# Altium PCB ESCREV6.PcbDoc
Units mm, origin at the board's own origin, x right, y up, seen from the top; angles counter-clockwise.
Board outline 41.56 x 22.07 mm, 2 copper layers (Top Layer, Bottom Layer), stack 1.571 mm thick; 59 components, 42 nets, 242 pads, 93 vias.
Unrouted connection lines stored in the file: 2.
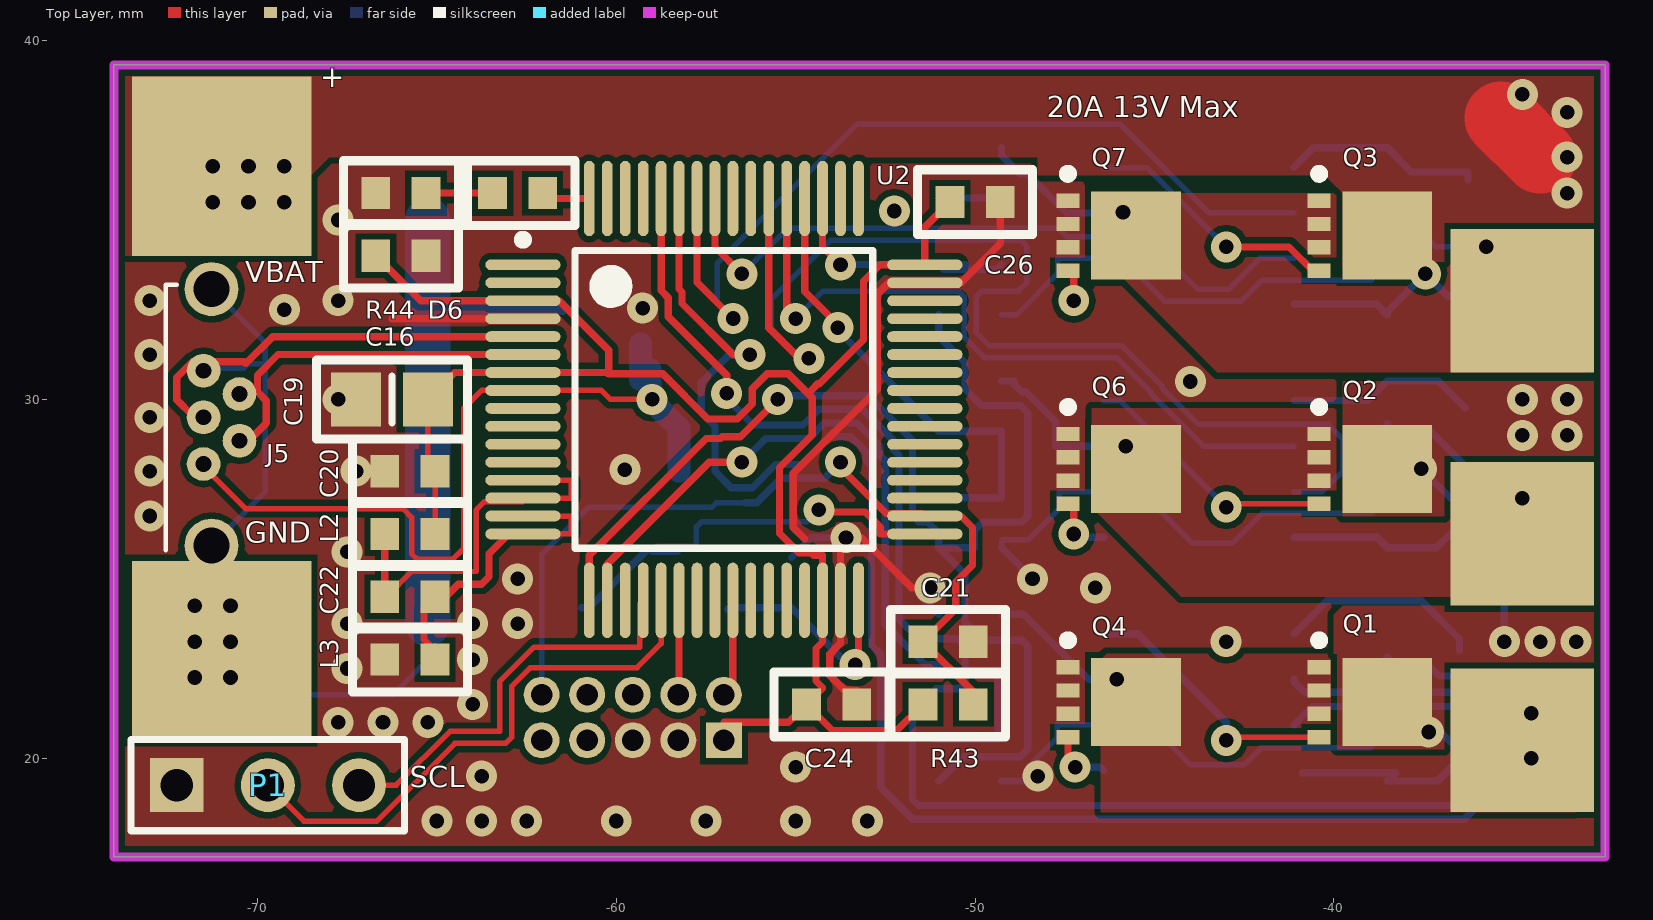
[diagram p0: Top Layer view]
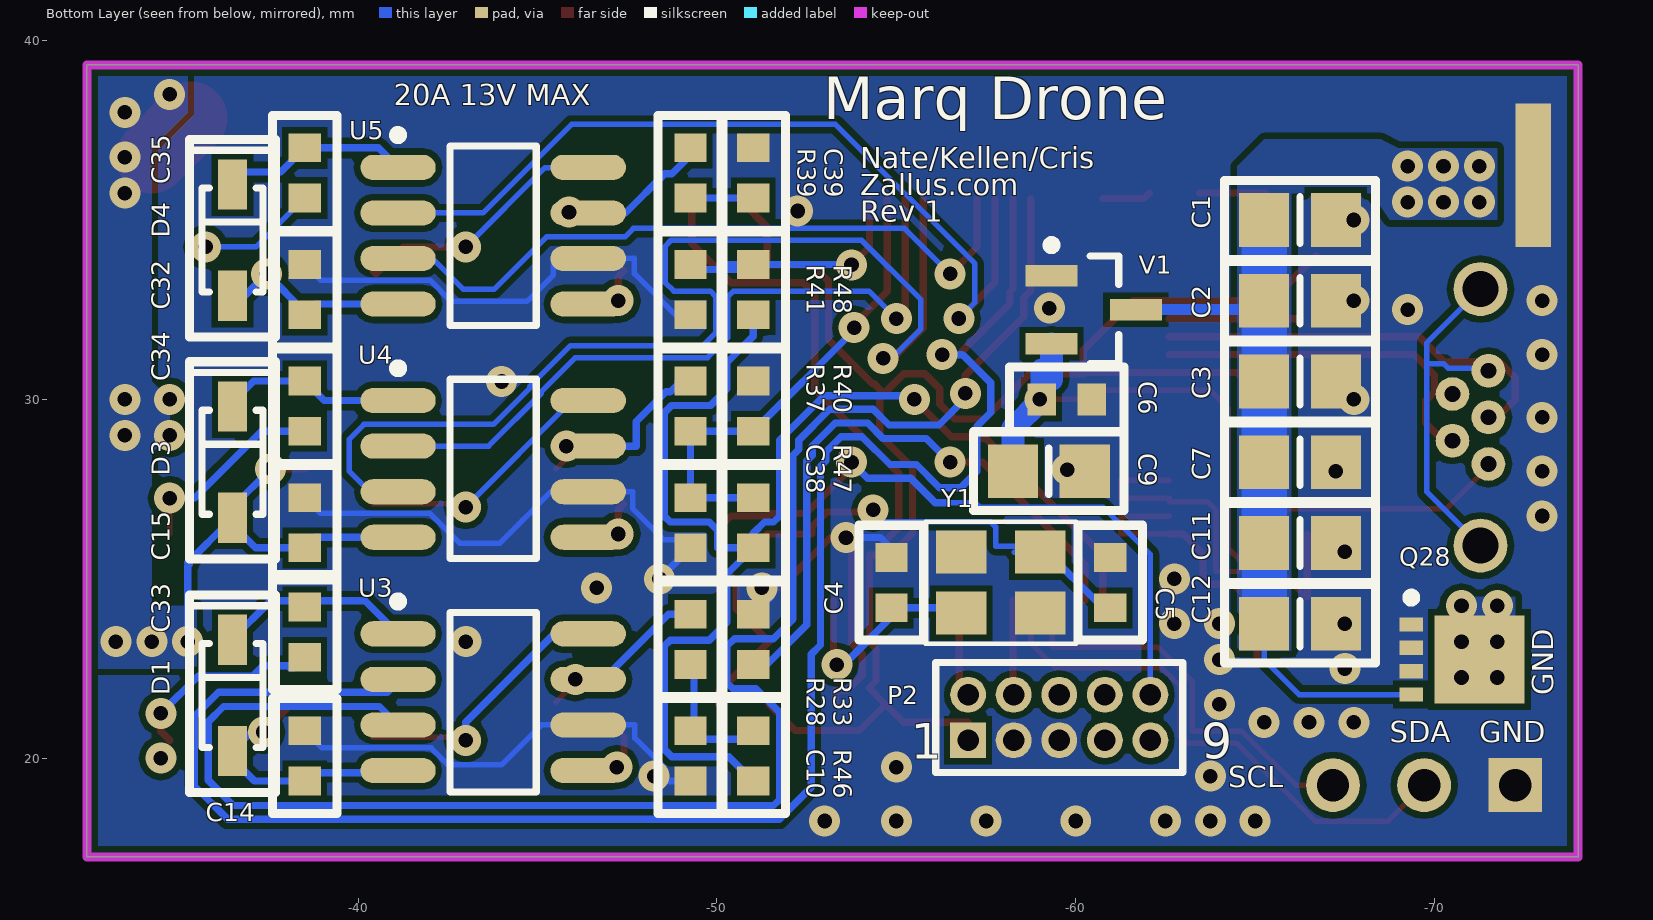
[diagram p1: Bottom Layer view, seen from below]
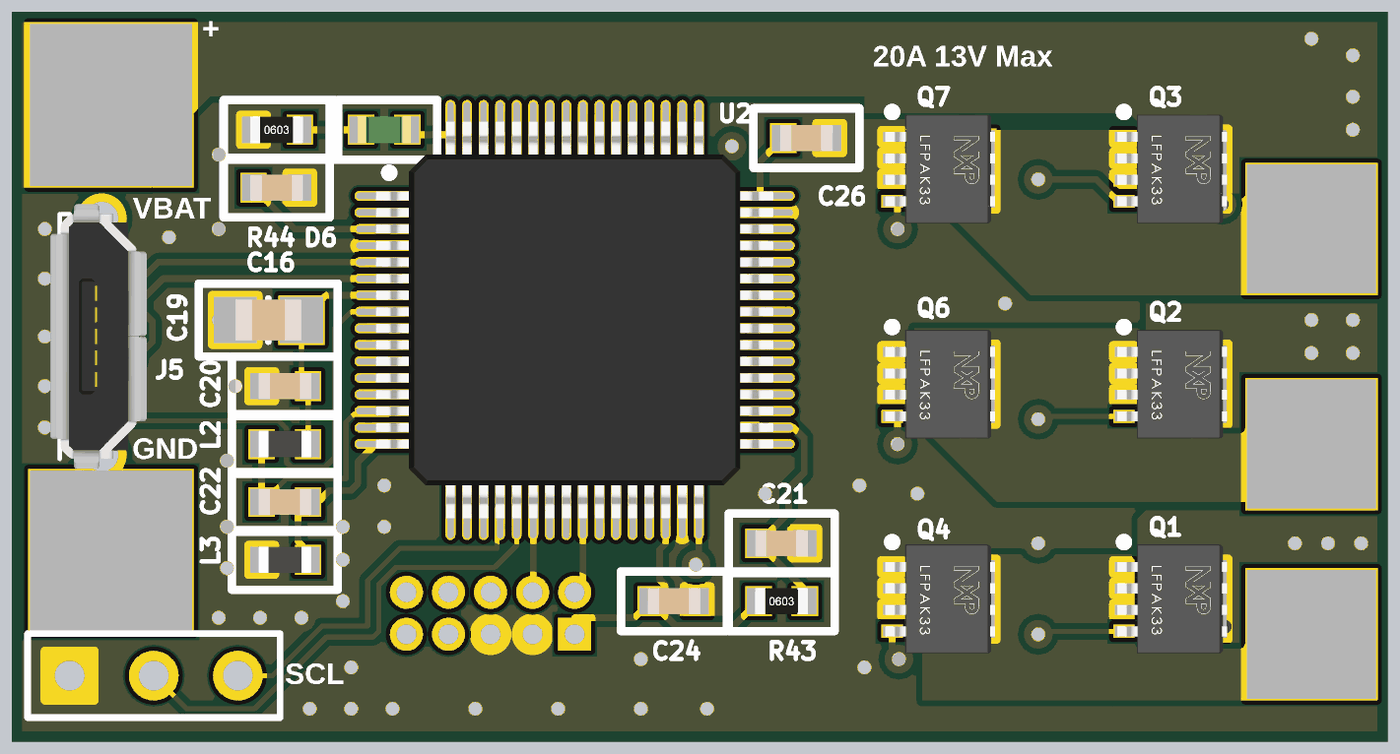
[diagram p2: 3D render of the assembled board from above, using the file's embedded part models]
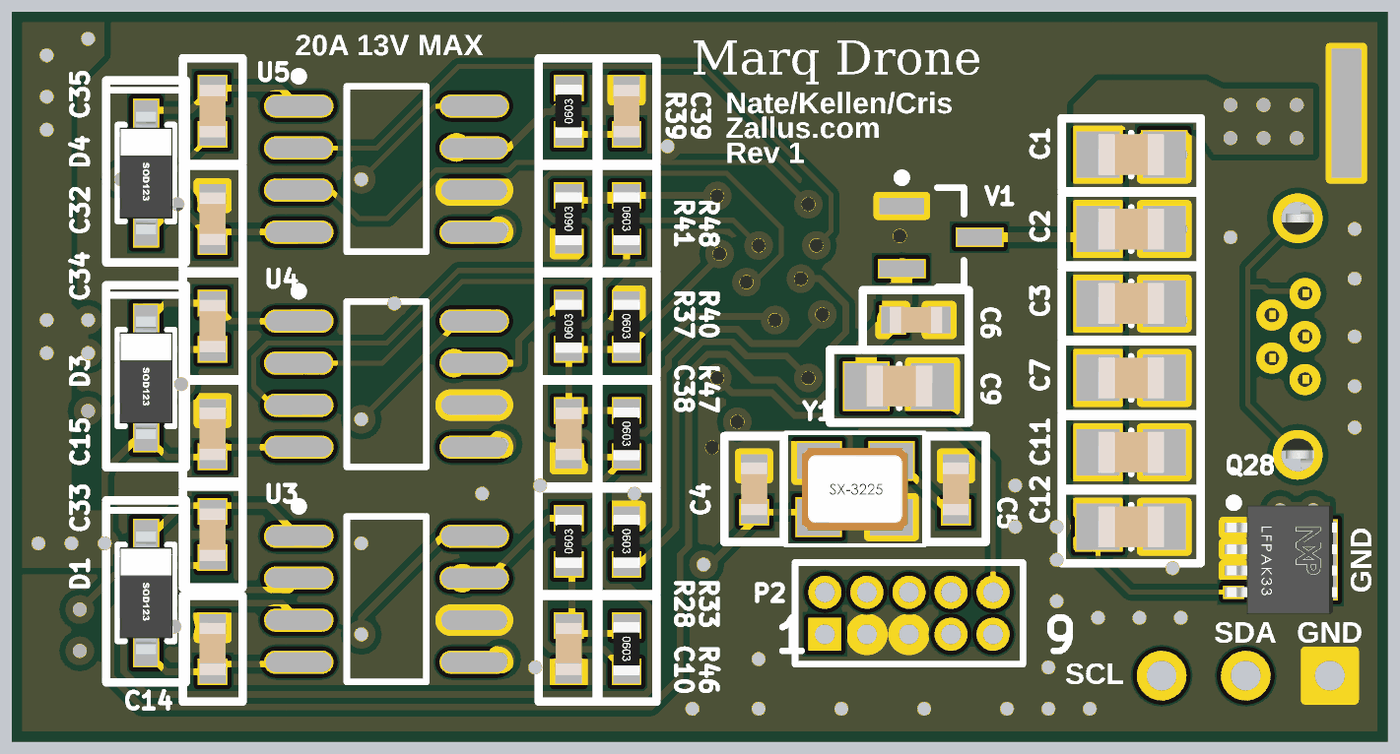
[diagram p3: 3D render of the assembled board from below, using the file's embedded part models]

## Layer stack, top to bottom
Top Solder: solder mask 0.0102, Solder Resist, Dk 3.5
Top Layer: signal copper 0.0356
Dielectric 1: core 1.5, FR-4, Dk 4.2
Bottom Layer: signal copper 0.0356
Solder Side: solder mask 0.0102, Solder Resist, Dk 3.5

## Board outline
-74,17.25 -32.444,17.25 -32.444,39.32 -74,39.32

## Design rules (kind name [scope] priority, off if disabled: settings)
AssemblyTestPointUsage [All] p1 off:
AssemblyTestpoint [All] p1 off: testpointundercomponent=TRUE minsize=1.016 maxsize=2.54 preferedsize=1.524 minholesize=0 maxholesize=1.016 preferedholesize=0.813 testpointgrid=0.025 usegrid=TRUE gridtolerance=0 allowsidetop=TRUE allowsidebottom=TRUE
Clearance Clearance_1 [InComponent('J13') OR InComponent('J16') OR InComponent('J7')] p1: gap=0.381
Clearance Clearance_3 [InComponent('H1') OR InComponent('H3') OR InComponent('H4') OR InComponent('H5') OR InComponent('H6') OR InComponent('H7') OR InComponent('H8') OR InComponent('H9')] p2: gap=0.381
Clearance Clearance_2 [(OnLayer('Test Planea')OR OnLayer('Test Plane'))] p3: gap=0.216
Clearance [All] p4: gap=0.178
ComponentClearance [All] p1 off: gap=0.254 collisioncheckmode=3 verticalgap=0.254 showdistances=FALSE
DiffPairsRouting [All] p1: maxlimit=5.08 minlimit=0.254 mostfreqgap=0.254 toplayer_minwidth=0.203 toplayer_maxwidth=0.381 toplayer_prefwidth=0.381 bottomlayer_minwidth=0.203 bottomlayer_maxwidth=0.381 bottomlayer_prefwidth=0.381 maxuncoupledlength=25.4
FabricationTestPointUsage [All] p1 off: valid=0 allowmultiple=FALSE
FabricationTestpoint [All] p1 off: side=3 testpointundercomponent=TRUE minsize=1.016 maxsize=2.54 preferedsize=1.524 minholesize=0 maxholesize=1.016 preferedholesize=0.813 testpointgrid=0.025 allowsidetop=TRUE allowsidebottom=TRUE usegrid=TRUE gridtolerance=0
HoleSize [All] p1: absolutevalues=TRUE maxlimit=6.35 minlimit=0.025 maxpercent=80.000 minpercent=20.000
HoleToHoleClearance [All] p1: gap=0.305 allowstackedmicrovias=FALSE
MinimumSolderMaskSliver [All] p1: minsoldermaskwidth=0.152
PasteMaskExpansion [All] p1: expansion=-0.051
PlaneConnect [All] p1: planeconnectstyle=Direct reliefexpansion=0.508 reliefentries=4 reliefconductorwidth=0.508 reliefairgap=0.254
PolygonConnect PolygonConnect_1 [(InComponent('D13') OR InComponent('D13') OR InComponent('L9')OR InComponent('L9')OR InComponent('R121')OR InComponent('Q15')OR InComponent('C89')OR InComponent('C90')OR InComponent('C85')OR InComponent('C86')OR InComponent('R118')OR InComponent('C84')OR InComponent('C95')OR InComponent('U12')OR  InComponent('U10')OR InComponent('C97')OR InComponent('C98')OR InComponent('C96')OR InComponent('U11')OR InComponent('D14')OR InComponent('L10')OR InComponent('R124')OR InComponent('C93')OR InComponent('R123'))] p1: connectstyle=Direct reliefconductorwidth=0.254 reliefentries=4 polygonreliefangle="90 Angle" airgapwidth=0.254
PolygonConnect [All] p2: connectstyle=Direct reliefconductorwidth=0.254 reliefentries=4 polygonreliefangle="90 Angle" airgapwidth=0.254
RoutingVias [All] p1: holewidth=0.406 width=0.864 viastyle="Through Hole" minholewidth=0.406 minwidth=0.864 maxholewidth=0.406 maxwidth=0.864
SMDEntry [All] p1: side=TRUE corner=FALSE anyangle=TRUE
SilkToSilkClearance [All] p1: silktosilkclearance=0.025
SilkToSolderMaskClearance SilkscreenOverComponentPads [IsPad] p1: minsilkscreentomaskgap=0.025 clearancetoexposedcopper=TRUE
SolderMaskExpansion SolderMaskExpansion_1 [InComponent('U2')OR InComponent('U27')OR InComponent('J14')] p1: expansion=0
SolderMaskExpansion [All] p2: expansion=0.127
Width Width_3 [InNet('GND')] p1: maxlimit=2.032 minlimit=0.152 preferedwidth=0.203 minimp=50.000000 maximp=50.000000 favimp=50.000000
Width Width_2 [InNet('3.3V')] p2: maxlimit=1.016 minlimit=0.152 preferedwidth=0.305
Width Width_1 [InNet('5V')] p3: maxlimit=1.016 minlimit=0.152 preferedwidth=0.305
Width [All] p4: maxlimit=2.032 minlimit=0.152 preferedwidth=0.203 minimp=50.000000 maximp=50.000000 favimp=50.000000
17 further rules are at their usual default settings.

## Classes and differential pairs
differential pair USB_MCU: +USB_MCU_P -USB_MCU_N

## Components (designator, comment, footprint, x,y, rotation, side; value= is the part's Value field where it differs from the comment)
C1 "Cap" 6-0805_MC -66.25,35 r0 bottom
C2 "Cap" 6-0805_MC -66.25,32.75 r0 bottom
C3 "Cap" 6-0805_MC -66.25,30.5 r0 bottom
C4 "CL05C180JB5NNNC" 1608[0603]C -54.864,24.892 r270 bottom
C5 "CL05C180JB5NNNC" 1608[0603]C -60.96,24.892 r270 bottom
C6 "0805" 1608[0603]C -59.75,30 r0 bottom
C7 "Cap" 6-0805_MC -66.25,28.25 r0 bottom
C9 "Cap" 6-0805_MC -59.25,28 r0 bottom
C10 "0805" 1608[0603]C -49.263,20.063 r90 bottom
C11 "Cap" 6-0805_MC -66.25,26 r0 bottom
C12 "Cap" 6-0805_MC -66.25,23.75 r0 bottom
C14 "0805" 1608[0603]C -38.513,20.063 r270 bottom
C15 "0805" 1608[0603]C -38.513,26.563 r270 bottom
C16 "0805" 1608[0603]C -66,34 r180 top
C19 "0805" 6-0805_MC -66.25,30 r180 top
C20 "0805" 1608[0603]C -65.75,28 r180 top
C21 "0805" 1608[0603]C -50.75,23.25 r180 top
C22 "0805" 1608[0603]C -65.75,24.5 r180 top
C24 "0805" 1608[0603]C -54,21.5 r180 top
C26 "0805" 1608[0603]C -50,35.5 r0 top
C32 "0805" 1608[0603]C -38.513,33.063 r270 bottom
C33 "0805" 1608[0603]C -38.513,23.513 r90 bottom
C34 "0805" 1608[0603]C -38.513,29.813 r90 bottom
C35 "0805" 1608[0603]C -38.513,36.313 r90 bottom
C38 "0805" 1608[0603]C -49.263,26.563 r90 bottom
C39 "0805" 1608[0603]C -51.013,36.313 r270 bottom
D1 "1N4148WFL-G3-08" SOD123_3D -36.5,21.75 r90 bottom
D3 "1N4148WFL-G3-08" SOD123_3D -36.5,28.25 r90 bottom
D4 "1N4148WFL-G3-08" SOD123_3D -36.5,34.442 r90 bottom
D6 "LED3" 1608[0603]LED -62.75,35.75 r180 top
J5 "614105150721" USB_Micro_Vertical -71.5,29.5 r90 top
L2 "FB" 1608[0603]L -65.75,26.25 r0 top
L3 "FB" 1608[0603]L -65.75,22.75 r180 top
P1 "Header 3" HDR1X3 -72.25,19.25 r0 top
P2 "Header 5X2" MHDR2X5 -57,20.5 r180 bottom
Q1 "PSMN011-60MLX" SOT1210_FET -39.013,21.563 r0 top
Q2 "PSMN011-60MLX" SOT1210_FET -39.013,28.063 r0 top
Q3 "PSMN011-60MLX" SOT1210_FET -39.013,34.563 r0 top
Q4 "PSMN011-60MLX" SOT1210_FET -46.013,21.563 r0 top
Q6 "PSMN011-60MLX" SOT1210_FET -46.013,28.063 r0 top
Q7 "PSMN011-60MLX" SOT1210_FET -46.013,34.563 r0 top
Q28 "PSMN011-60MLX" SOT1210_FET -70.75,22.75 r180 bottom
R28 "Res1" 1608[0603]R -49.263,23.313 r270 bottom
R33 "Res1" 1608[0603]R -51.013,23.313 r90 bottom
R37 "Res1" 1608[0603]R -49.263,29.813 r270 bottom
R39 "Res1" 1608[0603]R -49.263,36.313 r270 bottom
R40 "Res1" 1608[0603]R -51.013,29.813 r90 bottom
R41 "Res1" 1608[0603]R -49.263,33.063 r270 bottom
R43 "Res1" 1608[0603]R -50.75,21.5 r180 top
R44 "Res1" 1608[0603]R -66,35.75 r180 top
R46 "Res1" 1608[0603]R -51.013,20.063 r90 bottom
R47 "Res1" 1608[0603]R -51.013,26.563 r90 bottom
R48 "Res1" 1608[0603]R -51.013,33.063 r90 bottom
U2 "MKL25Z64VLH4" LQFP64_10mm_0.5mm -57,30 r0 top
U3 "ADP3110A" SOIC127P600-8BM -43.763,21.563 r180 bottom
U4 "ADP3110A" SOIC127P600-8BM -43.763,28.063 r180 bottom
U5 "ADP3110A" SOIC127P600-8BM -43.763,34.563 r180 bottom
V1 "MCP1702T-5002E/CB" SOT-23B_M -60.5,32.5 r180 bottom
Y1 "CX3225GB12000P0HPQCC" 3225_Crystal -57.912,24.892 r180 bottom

## Footprints (in the part's own frame and the unit in brackets; to place one, negate y for a bottom-side part, rotate by r counter-clockwise, add the part's x,y. Pads: shape width x height; smd on the part's side, far side on the other; paste and mask are expansions set on the pad)
6-0805_MC [mm] "Chip Resistor, Body 2.0x1.2mm, IPC Low Density"
  rect 1.4x1.5 smd: 1(-1,0) 2(1,0)
  silkscreen extent -2.1,-1.1 2.1,1.1, body extent -1,-0.62 1,0.63, height 0.59
1608[0603]C [mm] "Chip Capacitor, Body 1.6x0.8mm, IPC High Density"
  rect 0.8x0.9 smd: 1(-0.7,0) 2(0.7,0)
  silkscreen extent -1.6,-0.9 1.6,0.9, body extent -0.8,-0.4 0.8,0.4, height 0.78
1608[0603]L [mm] "Chip Capacitor, Body 1.6x0.8mm, IPC High Density"
  rect 0.8x0.9 smd: 1(-0.7,0) 2(0.7,0)
  silkscreen extent -1.6,-0.9 1.6,0.9, body extent -0.8,-0.4 0.8,0.4, height 0.8
1608[0603]LED [mm] "Chip Capacitor, Body 1.6x0.8mm, IPC High Density"
  rect 0.8x0.9 smd: 1(-0.7,0) 2(0.7,0)
  silkscreen extent -1.6,-0.9 1.6,0.9, body extent -0.8,-0.4 0.8,0.4, height 0.38
1608[0603]R [mm] "Chip Capacitor, Body 1.6x0.8mm, IPC High Density"
  rect 0.8x0.9 smd: 1(-0.7,0) 2(0.7,0)
  silkscreen extent -1.6,-0.9 1.6,0.9, body extent -0.8,-0.4 0.8,0.4, height 0.44
3225_Crystal [mm] "12 MHz Micro Crystal"
  rect 1.4x1.2 smd: 1(-1.1,-0.85) 2(1.1,-0.85) 3(1.1,0.85) 4(-1.1,0.85)
  silkscreen extent -2.1,-1.7 2.1,1.7, body extent -1.6,-1.25 1.6,1.25, height 0.81
HDR1X3 [mm] "Connector; Header; 3 Position"
  rect 1.5x1.5 hole 0.9: 1(0,0)
  round 1.5 hole 0.9: 2(2.54,0) 3(5.08,0)
  silkscreen extent -1.27,-1.27 6.35,1.27
LQFP64_10mm_0.5mm [mm] "Thin QFP, 64-Leads, Body 10x10mm, Pitch 0.5mm, IPC Low Density"
  oval 2.1x0.3 smd: 1(-5.6,3.75) 2(-5.6,3.25) 3(-5.6,2.75) 4(-5.6,2.25) 5(-5.6,1.75) 6(-5.6,1.25) 7(-5.6,0.75) 8(-5.6,0.25) 9(-5.6,-0.25) 10(-5.6,-0.75) 11(-5.6,-1.25) 12(-5.6,-1.75) 13(-5.6,-2.25) 14(-5.6,-2.75) 15(-5.6,-3.25) 16(-5.6,-3.75) 33(5.6,-3.75) 34(5.6,-3.25) 35(5.6,-2.75) 36(5.6,-2.25) 37(5.6,-1.75) 38(5.6,-1.25) 39(5.6,-0.75) 40(5.6,-0.25) 41(5.6,0.25) 42(5.6,0.75) 43(5.6,1.25) 44(5.6,1.75) 45(5.6,2.25) 46(5.6,2.75) 47(5.6,3.25) 48(5.6,3.75)
  oval 0.3x2.1 smd: 17(-3.75,-5.6) 18(-3.25,-5.6) 19(-2.75,-5.6) 20(-2.25,-5.6) 21(-1.75,-5.6) 22(-1.25,-5.6) 23(-0.75,-5.6) 24(-0.25,-5.6) 25(0.25,-5.6) 26(0.75,-5.6) 27(1.25,-5.6) 28(1.75,-5.6) 29(2.25,-5.6) 30(2.75,-5.6) 31(3.25,-5.6) 32(3.75,-5.6) 49(3.75,5.6) 50(3.25,5.6) 51(2.75,5.6) 52(2.25,5.6) 53(1.75,5.6) 54(1.25,5.6) 55(0.75,5.6) 56(0.25,5.6) 57(-0.25,5.6) 58(-0.75,5.6) 59(-1.25,5.6) 60(-1.75,5.6) 61(-2.25,5.6) 62(-2.75,5.6) 63(-3.25,5.6) 64(-3.75,5.6)
  silkscreen extent -5.72,-4.15 4.15,4.57, body extent -6,-6 6,6, height 1.6
MHDR2X5 [mm] "Connector; Header; 5x2 Position"
  rect 1x1 hole 0.6: 1(0,0)
  round 1 hole 0.6: 2(0,1.27) 3(1.27,0) 4(1.27,1.27) 5(2.54,0) 6(2.54,1.27) 7(3.81,0) 8(3.81,1.27) 9(5.08,0) 10(5.08,1.27)
  silkscreen extent -0.9,-0.9 5.98,2.17
SOD123_3D [mm] "SOD-123; 2 Leads; Body 2.7 x 1.6 mm, (LxW)"
  rect 1.4x0.8 smd: 1(-1.55,0) 2(1.55,0)
  silkscreen extent -2.7,-1.2 2.8,1.2, body extent -1.85,-0.8 1.85,0.8, height 1.27
SOIC127P600-8BM [mm] "SOIC, 8-Leads, Body 4.9x3.9mm, Pitch 1.27mm, IPC Low Density"
  oval 2.1x0.7 smd: 1(-2.65,1.905) 2(-2.65,0.635) 3(-2.65,-0.635) 4(-2.65,-1.905) 5(2.65,-1.905) 6(2.65,-0.635) 7(2.65,0.635) 8(2.65,1.905)
  silkscreen extent -2.78,-2.5 1.2,2.93, body extent -2,-2.5 2,2.5, height 2.59
SOT1210_FET [mm] "DPAK, 5-Leads, Body 3.4x2.7mm, Pitch 0.65mm, IPC High Density"
  rect 0.65x0.4 smd: 1(-1.4,0.975) 2(-1.4,0.325) 3(-1.4,-0.325) 4(-1.4,-0.975)
  rect 2.5x2.45 smd: 5(0.5,0)
  silkscreen extent -1.52,1.6 -1.27,1.85, body extent -1.61,-1.65 1.71,1.65, height 0.92
SOT-23B_M [mm] "SOT23, 3-Leads, Body 2.9x1.3mm, Pitch 0.95mm, Lead Span 2.4mm, IPC Low Density"
  rect 1.45x0.6 smd: 1(-1.175,0.95) 2(-1.175,-0.95) 3(1.175,0)
  silkscreen extent -1.3,-1.5 0.7,1.92, body extent -0.7,-1.5 0.7,1.5, height 1.14
USB_Micro_Vertical [mm] "WR-COM_USB_Micro Type B_Vertical_THT Micro Type B Vertical THT"
  round 0.94 hole 0.44 mask+0: 1(-1.3,0) 2(-0.65,-1) 3(0,0) 4(0.65,-1) 5(1.3,0)
  round 1.5 hole 1 mask+0: Z1(-3.575,-0.22) Z2(3.575,-0.22)
  silkscreen extent -3.7,0.75 3.7,1.05, body extent -3.99,-1.57 4.01,1.33, height 5.62

## Part data
C1 C2 C3 C7 C9 C11 C12: "Capacitor"
C4 C5 C6 C10 C14 C15 C16 C19 C20 C21 C22 C24 C26 C32 C33 C34 C35 C38 C39: library part "Cap Semi", "Capacitor (Semiconductor SIM Model)"
D1 D3 D4: library part "Diode 1N4148", "High Conductance Fast Diode"
D6: "Typical BLUE SiC LED"
J5: library part "WR-Communication Connectors 614105150721", "WR-COM_USB_Micro Type B_Vertical_THT"
L2 L3: library part Inductor, "Inductor"
P1: "Header, 3-Pin"
P2: "Header, 5-Pin, Dual row"
Q1 Q2 Q3 Q4 Q6 Q7 Q28: library part CMP-1258-00026-1, "N-Channel Logic Level MOSFET, 60 V, 61 A, 5-Pin SOT1210, Reel"
R28 R33 R37 R39 R40 R41 R43 R44 R46 R47 R48: "Resistor"
U2: "MKL25Z64VLH4 MCU"
V1: library part MCP1700, "MCP1700 3.3V REG"
Y1: library part 12MHz_Crystal, "12MHz Micro Crystal"

## Free pads (board coordinates)
  rect 5x5 smd: 1(-71,23) 1(-71,36.5)
  rect 4x4 smd: 1(-34.75,20.5) 1(-34.75,26.25) 1(-34.75,32.75)
  rect 1x4 smd far side: 3(-72.75,36.25)

## Via types
v1: diameter 0.864, hole 0.406, Top Layer to Bottom Layer, tented both sides, 93 vias

## Nets (pads, with @x,y where several pads share a name; then routed paths per layer and width w, separated by ;. In a path a pad name is that pad's centre, name@x,y a point inside that pad or via, vN(x,y) a via of type N, cw(c..) or ccw(c..) an arc to the next point about the centre after c; other vN are vias at no path point)
3.3V: C16.2 C19.1 C20.1 C24.2 C26.1 L2.2 P2.1 R43.2 U2.3 U2.7 U2.30 U2.48 | length 48.9
  Top Layer w0.152: C19.1 -65.25,28.2 C20.1 L2.2 ; -54.68,30.186 -54.63,30.186 -54.566,30.25
  Top Layer w0.203: C16.2 -65.45,32.75 U2.3 -61.593,32.75 -60.211,31.368 -60.211,30.705 ; C19.1 -64.5,30.75 U2.7 -60.256,30.75 -60.211,30.705 ; -57,21 -55.2,21 C24.2 ; -54.566,30.25 -54.383,30.433 -54.338,30.433 -53.11,31.661 -53.11,33.295 -52.656,33.75 U2.48 -51.4,34.8 C26.1 ; R43.2 -52.179,20.771 -53.971,20.771 C24.2 ; -60.211,30.705 -60.205,30.711 -58.705,30.711 -57.45,29.456 -56.628,29.456 -56.211,29.873 -56.211,30.295 -55.794,30.711 -55.205,30.711 -54.68,30.186 -54.539,30.045 -54.539,29.006 -55.448,28.096 -55.448,26.27 -54.908,25.729 -54.572,25.729 -54.499,25.656 -54.25,25.656 U2.30 -54.25,23.241 -54.432,23.058 -54.432,22.154 -54.25,21.971 -54.25,21.95 C24.2
3H_EXTERN: U2.46
5V: C6.2 C9.2 J5.1 U2.8 V1.2 | length 23.1
  Top Layer w0.152: J5.1 -71.5,28.126 -70.328,26.954 -65.945,26.954 -65.704,26.713 -65.704,25.695 -65.555,25.546 -64.545,25.546 -64.25,25.841 -64.25,29.75 -63.75,30.25 U2.8 -60.415,30.25 -60.165,30 v1(-59,30)
  Bottom Layer w0.635: V1.2 -59.325,30.55 -59.05,30.825 C6.2 ; C6.2@-59.025,29.975 -58.25,29.2 C9.2
A_BLMA: C10.2 R28.2 R33.1 R46.2 U2.18 | length 21.1
  Top Layer w0.203: U2.18 -60.25,25.407 -57.407,28.25 v1(-56.5,28.25)
  Bottom Layer w0.203: v1(-56.5,28.25) -55.842,28.908 -54.637,28.908 -54.202,29.342 -53.297,29.342 -52.658,28.702 -52.658,28.447 -52.504,28.293 -52.504,23.72 -51.396,22.613 R33.1 ; R46.2@-51.113,20.531 -49.363,20.531 R28.2@-49.363,22.381
A_BLMH: U2.60 U3.3 | length 47.9
  Top Layer w0.203: U2.60 -58.75,33.036 -58.551,32.837 -58.551,32.301 -56.922,30.672 v1(-56.922,30.167)
  Bottom Layer w0.203: v1(-56.922,30.167) -56.922,30.024 -56.187,29.289 -54.795,29.289 -54.36,29.723 -53.14,29.723 -52.277,28.86 -52.277,28.604 -52.123,28.451 -52.123,23.878 -51.578,23.333 -50.488,23.333 -50.283,23.128 -50.283,22.097 -50.447,21.933 -51.087,21.933 -51.742,21.278 -51.742,18.847 -51.578,18.683 -36.522,18.683 -35.821,19.384 -35.821,21.016 -36.247,21.442 -40.598,21.442 U3.3
A_BLML: U2.59 U3.2 | length 50.5
  Top Layer w0.203: U2.59 -58.25,33.075 -58.17,32.994 -58.17,32.676 -56.743,31.249 v1(-56.279,31.249)
  Bottom Layer w0.203: v1(-56.279,31.249) -56.847,31.249 -57.633,30.462 -57.633,29.633 -57.25,29.25 -57.25,27.994 -56.794,27.539 -56.205,27.539 -55.559,28.185 -54.821,28.185 -54.044,28.961 -53.455,28.961 -53.039,28.545 -53.039,28.289 -52.885,28.135 -52.885,23.157 -52.629,22.901 -52.629,19.195 -51.736,18.302 -36.364,18.302 -35.44,19.226 -35.44,21.174 -36.108,21.842 -40.822,21.842 -41.113,22.133 U3.2
A_PUMP: C33.2 D1.2 U3.1 | length 5.8
  Bottom Layer w0.203: U3.1 -40.192,24.388 -37.563,24.388 -36.5,23.325 D1.2@-36.5,23
B_BLMA: C38.2 R37.2 R40.1 R47.2 U2.52 | length 13.4
  Top Layer w0.203: U2.52 -54.75,33.006 -53.822,32.077 v1(-53.822,32)
  Bottom Layer w0.203: v1(-53.822,32) -53.822,31.922 R40.1 R37.2 C38.2 R47.2
B_BLMH: U2.54 U4.3 | length 32.7
  Top Layer w0.203: U2.54 -55.75,31.994 -54.9,31.144 v1(-54.633,31.144)
  Bottom Layer w0.152: v1(-54.633,31.144) -54.864,31.144 -55.686,31.966 -55.686,32.784 -54.034,34.436 -48.727,34.436 -48.559,34.268 -48.559,33.257 -48.799,33.017 -49.818,33.017 -49.967,32.868 -49.967,31.857 -49.606,31.497 -45.921,31.497 -44.778,30.354 -44.778,30.308 -43.771,29.302 -40.162,29.302 -39.75,28.889 -39.75,28 -40.322,27.428 U4.3
B_BLML: U2.53 U4.2 | length 20.1
  Top Layer w0.203: U2.53 -55.25,32.5 v1(-55,32.25)
  Bottom Layer w0.152: v1(-55,32.25) -54.233,33.017 -50.457,33.017 -50.297,32.856 -50.297,31.721 -49.743,31.167 -46.057,31.167 -45.109,30.218 -45.109,30.172 -43.634,28.698 U4.2
B_PUMP: C34.2 D3.2 U4.1 | length 5.3
  Bottom Layer w0.203: U4.1 -39.058,29.968 C34.2 -37.088,30.513 D3.2@-36.338,29.762
C_BLMA: C39.2 R39.2 R41.1 R48.2 U2.51 | length 9.2
  Top Layer w0.203: U2.51 -54.25,34.25 v1(-53.75,33.75)
  Bottom Layer w0.203: v1(-53.75,33.75) -53.737,33.763 -50.262,33.763 ; R48.2 -50.869,33.619 -49.406,33.619 R41.1 ; C39.2 R39.2
C_BLMH: U2.57 U5.3 | length 19.4
  Top Layer w0.203: U2.57 -57.25,34.25 v1(-56.5,33.5)
  Bottom Layer w0.152: v1(-56.5,33.5) -55.234,34.766 -47.674,34.766 -47.439,34.532 -45.251,34.532 -43.784,33.064 -42.936,33.064 -42.072,33.928 U5.3
  other v1: -52.25,35.25
C_BLML: U2.58 U5.2 | length 24.2
  Top Layer w0.203: U2.58 -57.75,33.262 v1(-56.744,32.256)
  Bottom Layer w0.152: v1(-56.744,32.256) -57.186,32.697 -57.186,33.784 -53.303,37.667 -45.95,37.667 -43.481,35.198 U5.2
CMP_OUT: U2.1
EXTAL+: C4.2 U2.32 Y1.1 | length 6.1
  Top Layer w0.203: v1(-53.34,22.606) -53.25,22.696 U2.32
  Bottom Layer w0.203: Y1.1@-56.9,24.15 -56.858,24.192 -55.118,24.192 -53.532,22.606 v1(-53.34,22.606)
EXTAL-: C5.2 U2.33 Y1.3 | length 12.1
  Top Layer w0.203: v1(-54.356,26.924) -54.293,26.861 -53.057,26.861 -52.641,26.445 -52.641,26.25 U2.33
  Bottom Layer w0.152: -58.283,25.742 Y1.3 -58.846,25.908 -57.766,25.908 -57.766,26.447 -57.617,26.596 -54.684,26.596 v1(-54.356,26.924)
  Bottom Layer w0.203: C5.2 -60.758,24.192 Y1.3@-59.11,25.84
GATE_A_H: Q1.4 U3.8 | length 7.6
  Top Layer w0.152: v1(-43,20.5) -42.912,20.588 Q1.4
  Bottom Layer w0.203: U3.8 -45.468,23.468 -43,21 v1(-43,20.5)
GATE_A_L: Q4.4 U3.5 | length 1.9
  Top Layer w0.203: Q4.4 -47.413,19.962 v1@-47.108,19.658
  Bottom Layer w0.203: v1(-47.209,19.75) -46.505,19.75 U3.5
GATE_B_H: Q2.4 U4.8 | length 7.6
  Top Layer w0.152: v1(-43,27) -42.912,27.087 Q2.4
  Top Layer w0.203: v1@-43.312,27.087 v1@-43,27.087
  Bottom Layer w0.152: U4.8 -45.967,29.968 v1(-43,27)
GATE_B_L: Q6.4 U4.5 | length 1.8
  Top Layer w0.203: Q6.4 -47.25,26.925 v1(-47.25,26.25)
  Bottom Layer w0.203: v1(-47.25,26.25) -47.25,26.158 U4.5
GATE_C_H: Q3.4 U5.8 | length 7.3
  Top Layer w0.203: v1(-43,34.25) -41.25,34.25 -40.5,33.5 Q3.4
  Bottom Layer w0.152: U5.8 -46.413,36.463 -45.212,36.463 v1(-43,34.25)
GATE_C_L: Q7.4 U5.5 | length 0.9
  Top Layer w0.203: Q7.4 -47.25,33.425 v1(-47.25,32.75)
GND: C1.1 C2.1 C3.1 C4.1 C5.1 C6.1 C7.1 C9.1 C10.1 C11.1 C12.1 C14.1 C15.1 C16.1 C19.2 C20.2 C21.1 C24.1 C26.2 C32.1 C38.1 C39.1 L3.2 P1.1 P2.3 P2.5 pad.3 Q4.1 Q4.2 Q4.3 Q6.1 Q6.2 Q6.3 Q7.1 Q7.2 Q7.3 Q28.1 Q28.2 Q28.3 R33.2 R40.2 R41.2 R44.2 U2.4 U2.31 U2.47 U3.6 U4.6 U5.6 V1.1 Y1.2 Y1.4 | length 67.6
  Top Layer w0.203: -66.25,32.25 U2.4 ; -54.75,26.11 -55.067,26.428 -55.067,27.938 -52.729,30.276 -52.729,32.928 -52.407,33.25 U2.47 -50.393,33.25 -49.3,34.343 C26.2 ; C24.1 -53.3,21.895 -53.635,21.895 -54.051,22.311 -54.051,22.901 -53.75,23.202 U2.31 -53.75,25.996 v1(-53.596,26.15) -53.164,26.15 -51.764,24.75 v1(-51.25,24.75)
  Bottom Layer w0.152: C38.1 -49.263,26.087 -48.526,26.087 -47.653,26.961 -47.653,27.428 U4.6 -45.38,27.428 -44.579,26.626 -44.579,26.621 -43.954,25.996 -42.829,25.996 -42.001,26.824 -38.951,26.824 C15.1 ; R41.2 -48.838,32.363 -47.698,33.503 -47.698,33.928 U5.6 -45.439,33.928 -45.439,33.472 -44.701,32.734 -42.59,32.734 -42.001,33.324 -38.951,33.324 C32.1 ; v1@-48.513,19.764 -47.715,20.562 -47.715,20.928 U3.6 -45.11,20.928 -43.996,19.814 -42.51,19.814 -42.038,20.286 -38.989,20.286 C14.1
  Bottom Layer w0.203: C4.1@-55.118,25.592 -54.56,26.15 v1(-53.596,26.15) ; v1(-51.25,24.75) -51.5,24.5 R33.2 ; C10.1 -48.137,19.363 -48.25,19.475 v1(-48.25,19.5) ; C38.1 v1(-48.4,25)
  other v1: -65,18.25 -63.75,18.25 -62.5,18.25 -60,18.25 -57.5,18.25 -55,18.25 -53,18.25 -63.75,19.5 -55,19.75 -67.75,21 -66.5,21 -65.25,21 -64,21.5 -67.5,22.5 -64,22.75 -43,23.25 -67.5,23.75 -64,23.75 -62.75,23.75 -46.65,24.75 -62.75,25 -67.5,25.75 -73,26.75 -73,28 -67.25,28 -59.762,28.042 -73,29.5 -67.75,30 -44,30.5 -73,31.25 -69.25,32.5 -59.262,32.542 -73,32.75 -67.75,32.75 -67.75,35
GND_EXT: J5.5 J5.Z1 J5.Z2 pad.1@-71,23 Q28.5 | length 10.2
  Bottom Layer w0.152: J5.5 -71.5,30.874 -70.376,30.874 -70.25,31 -69.776,31 ; J5.Z1 -69.776,27.429 -69.776,31 ; J5.Z2 -69.776,31.571 -69.776,31
  other v1: -71.75,22.25 -70.75,22.25 -71.75,23.25 -70.75,23.25 -71.75,24.25 -70.75,24.25
KL25_SWD_CLK: P2.4 U2.22 | length 2.1
  Top Layer w0.203: -58.25,22.27 U2.22
LED: D6.1 U2.64 | length 1.4
  Top Layer w0.203: D6.1 -61.9,35.6 U2.64
NetC22_1: C22.1 L3.1 U2.15 U2.16 | length 8.8
  Top Layer w0.152: U2.16 -61.25,26.25 -61.25,26.75 U2.15
  Top Layer w0.203: L3.1 -65.05,23.098 -65.147,23.098 -65.356,23.307 -65.356,24.194 C22.1 -64.75,24.5 -64.402,24.848 -63.757,24.848 -63.548,25.057 -63.548,25.702 -63,26.25 U2.16
NetC22_2: C22.2 L2.1 U2.13 U2.14 | length 11
  Top Layer w0.152: C22.2 -66.408,24.5 -65.704,25.204 -63.904,25.204 -63.904,26.917 -63.667,27.154 -62.6,27.154 U2.14 -61.25,27.25 -61.25,27.75 U2.13
  Top Layer w0.203: C22.2 L2.1
NetC35_2: C35.2 D4.2 U5.1 | length 5.6
  Bottom Layer w0.203: U5.1 -40.567,37.013 C35.2 -37.84,36.34 -36.263,36.34 D4.2@-36.263,36.113
NetD6_2: D6.2 R44.1 | length 1.9
  Top Layer w0.203: R44.1 D6.2
NEUTRAL: R46.1 R47.1 R48.1 U2.17 | length 36.6
  Top Layer w0.203: U2.17 -60.75,25.656 -57.498,28.908 -57.098,28.908 -57.044,28.961 -56.539,28.961 v1(-55.5,30)
  Bottom Layer w0.203: v1(-55.5,30) -55.396,30.104 -52.982,30.104 -51.742,28.864 -51.742,28.597 -51.742,26.747 -51.578,26.583 -51.325,26.583 -51.012,26.271 R47.1 ; R46.1 -50.333,20.042 -48.738,20.042 -48.533,20.247 -48.533,23.128 -48.697,23.292 -49.787,23.292 -50.283,23.788 -50.283,25.133 R47.1 ; R48.1 -51.012,31.76 -50.283,31.03 -50.283,30.288 -49.828,29.833 -48.738,29.833 -48.533,29.628 -48.533,26.747 -48.697,26.583 -49.787,26.583 -50.019,26.351 -50.019,25.863 R47.1
OUT1: C33.1 pad.1@-34.75,20.5 Q1.1 Q1.2 Q1.3 Q4.5 R28.1 U3.7 | length 10.1
  Top Layer w0.152: v1(-46.052,22.198) -46,22.25 -46,22.05 Q4.5
  Top Layer w0.203: pad.1@-34.75,20.5 -34.5,20.75 v1(-34.5,21.25)
  Bottom Layer w0.203: R28.1 -48.652,24.013 -46.837,22.198 U3.7 ; C33.1 -38.214,22.514 -38.105,22.514 -38.04,22.579 -37.348,22.579 -37.058,22.289 -35.539,22.289 v1(-34.5,21.25)
  other v1: -34.5,20
OUT2: C34.1 pad.1@-34.75,26.25 Q2.1 Q2.2 Q2.3 Q6.5 R37.1 U4.7 | length 11.3
  Top Layer w0.152: v1(-45.802,28.698) -45.75,28.75 -45.75,28.3 Q6.5 ; pad.1@-34.75,26.25 v1(-34.75,27.25)
  Bottom Layer w0.152: U4.7 v1(-45.802,28.698)
  Bottom Layer w0.203: R37.1 -48.914,30.513 -48.914,30.424 -48.706,30.216 -48.582,30.216 -47.751,29.385 -47.751,28.698 U4.7 ; C34.1@-38.513,29.327 C34.1 -37.308,29.113 -35.445,27.25 v1(-34.75,27.25)
OUT3: C35.1 pad.1@-34.75,32.75 Q3.1 Q3.2 Q3.3 Q7.5 R39.1 U5.7 | length 7.1
  Bottom Layer w0.152: C35.1 -37.15,34.25 v1(-35.75,34.25)
  Bottom Layer w0.203: R39.1 -49.263,36.804 -48.75,36.292 -48.547,36.292 -47.453,35.198 U5.7
  other v1: -45.877,35.217
RST_TGTMCU: C21.2 P2.10 R43.1 U2.34 | length 23.4
  Top Layer w0.203: v1(-53.75,28.25) -53.75,28.093 -52.478,26.821 -51.471,26.821 U2.34 -50.393,26.75 -50.071,26.428 -50.071,25.381 -50.539,24.913 -50.539,24.161 C21.2 -50.05,21.85 R43.1
  Bottom Layer w0.152: -62.08,22.27 -62.08,25.681 -60.765,26.996 -57.332,26.996 -57.209,27.119 -56.408,27.119
  Bottom Layer w0.203: -56.408,27.119 -56.086,27.119 -55.402,27.804 -54.196,27.804 v1(-53.75,28.25)
SCL: P1.3 U2.20 | length 11.6
  Top Layer w0.152: P1.3 -66.133,19.25 -64.633,20.75 -63.25,20.75 -63.25,22.133 -62.287,23.096 -59.346,23.096 -59.346,24.304 U2.20
SDA: P1.2 U2.21 | length 15.5
  Top Layer w0.152: P1.2 -68.706,18.246 -66.67,18.246 -64.5,20.416 -63.084,20.416 -62.916,20.584 -62.916,22 -62.392,22.524 -59.418,22.524 -58.75,23.192 U2.21
SWD_DIO_TGTMCU: P2.2 U2.25 | length 2.4
  Top Layer w0.203: P2.2@-56.75,22.02 U2.25
USB_MCU_N: J5.2 U2.6 | length 10
  Top Layer w0.203: J5.2@-70.5,28.901 -70.19,28.901 -69.751,29.34 -69.751,29.96 -70,30.21 -70,30.675 -69.425,31.25 U2.6
USB_MCU_P: J5.3 U2.5 | length 11.7
  Top Layer w0.203: J5.3@-71.5,29.551 -71.81,29.551 -72.249,29.99 -72.249,30.61 -71.81,31.049 -70.374,31.049 -70.323,30.998 -69.571,31.75 U2.5
VP1: C1.2 C2.2 C3.2 C7.2 C11.2 C12.2 C14.2 C15.2 C32.2 D1.1 D3.1 D4.1 pad.1@-71,36.5 Q1.5 Q2.5 Q3.5 Q28.4 U3.4 U4.4 U5.4 V1.3 | length 47.6
  Top Layer w0.203: Q1.5 -38.513,21.513 -38.141,21.513 v1(-37.36,20.731) ; Q2.5 v1(-37.563,28.063)
  Top Layer w2.032: -35.344,37.844 -34.25,36.75
  Bottom Layer w0.152: Q28.4 -66.225,21.775 -65.25,22.75 C12.2
  Bottom Layer w0.203: U4.4 -38.808,26.158 C15.2 -37.138,25.862 D3.1@-36.4,26.6 ; U5.4 -38.808,32.658 C32.2 -38.512,32.438 v1(-37.45,33.5) -36.842,32.892 D4.1 ; U3.4@-40.888,19.598 -38.276,19.598 C14.2 -37.12,19.362 D1.1@-36.338,20.144 ; v1(-37.563,28.063) -36.5,27 D3.1 D3.1@-36.4,26.6 ; v1(-37.36,20.731) -37.031,20.731 D1.1 ; v1(-35.25,23.25) -35.25,25.35 -35.3,25.4 -35.25,25.45 D3.1@-36.4,26.6
  Bottom Layer w0.305: C2.2 -65,32.5 V1.3@-61.5,32.5
  Bottom Layer w1.27: C12.2 C11.2 C7.2 C3.2 C2.2 C1.2
  other v1: -34.25,23.25 -33.25,23.25 -34.75,29 -33.5,29 -34.75,30 -33.5,30 -71.25,35.5 -70.25,35.5 -69.25,35.5 -33.5,35.75 -71.25,36.5 -70.25,36.5 -69.25,36.5 -33.5,36.75 -33.5,38 -34.75,38.5
pads on no net: J5.4 P2.6 P2.7 P2.8 P2.9 U2.2 U2.9 U2.10 U2.11 U2.12 U2.19 U2.23 U2.24 U2.26 U2.27 U2.28 U2.29 U2.35 U2.36 U2.37 U2.38 U2.39 U2.40 U2.41 U2.42 U2.43 U2.44 U2.45 U2.49 U2.50 U2.55 U2.56 U2.61 U2.62 U2.63

## Polygon pours and split planes (outlines as drawn)
VP1 on Top Layer "Top Layer-No Net 1" (solid, remove dead copper, pour order 1): -69.75,36 -68.75,36 -68,36.75 -48,36.75 -48,38 -47.25,38.75 -47.25,39.75 -74.5,39.75 -74.75,40 -74.75,34 -69.75,34
GND on Top Layer "Top Layer-No Net 1" (solid, remove dead copper, pour order 18): -75.5,40.75 -75,40.25 -30.75,40.25 -30.75,15.25 -29.75,14.25 -31.25,15.75 -74.5,15.75
OUT3 on Top Layer "Top Layer-No Net 1" (solid, remove dead copper, pour order 4): -40.75,33.75 -39.75,33.75 -39.75,35.75 -46.75,35.75 -46.75,34.25 -45.25,32.75 -43.25,30.75 -33,30.75 -33,33.75
GND on Top Layer "Top Layer-No Net 1" (solid, remove dead copper, pour order 12): -50.25,20 -50,20.25 -46.75,20.25 -46.75,35.684 -47.066,36 -51,36 -51,20.25
OUT1 on Top Layer "Top Layer-No Net 1" (solid, remove dead copper, pour order 10): -36.5,22.25 -33,22.25 -33,18.75 -33.25,18.5 -46.5,18.5 -46.5,22.75 -46.335,22.915 -40,22.915 -40,20.34 -39.91,20.25 -36.75,20.25 -36.75,22.25
OUT2 on Top Layer "Top Layer-No Net 1" (solid, remove dead copper, pour order 8): -36.5,28 -33,28 -33,24.5 -43,24.5 -44.25,24.5 -46.75,27 -46.75,29.75 -40,29.75
VP1 on Top Layer "Top Layer-No Net 1" (solid, remove dead copper, pour order 6): -32.75,24.25 -32.75,21.75 -34.25,20.25 -40,20.25 -40,24 -39.75,24.25
VP1 on Top Layer "Top Layer-No Net 1" (solid, remove dead copper, pour order 5): -39.75,26.75 -32.75,26.75 -32.75,30 -32.75,30.5 -39.75,30.5
VP1 on Top Layer "Top Layer-No Net 1" (solid, remove dead copper, pour order 3): -39.75,33.5 -39.5,33.75 -31.75,34 -31.937,38.813 -31.983,40.001 -43,39.75 -48.25,39.75 -48.25,38.5 -48.25,36.25 -40.25,36.25 -39.75,35.75
VP1 on Bottom Layer "Top Layer-No Net 1" (solid, remove dead copper, pour order 0): -68.75,35 -71.75,35 -71.75,37 -69,37 -68.5,37.25 -65.25,37.25 -64.75,36.75 -64.5,36.5 -64.5,35.5 -64.5,23 -66,23 -66,35.75 -68.25,35.75
VP1 on Bottom Layer "Top Layer-No Net 1" (solid, remove dead copper, pour order 2): -35.25,39.32 -35.25,38 -34.25,37 -34.25,35.25 -34.25,30.5 -34.75,30 -34.75,29 -34.25,28.5 -34.25,24.25 -35.5,24.25 -35.5,22.5 -32,22.5 -32.444,22.944 -32.444,39.32
GND on Bottom Layer "Top Layer-No Net 1" (solid, remove dead copper, pour order 16): -75.75,41 -30.75,41 -30.25,40.5 -30.25,15.75 -75.75,15.75 -76,16
GND_EXT on Bottom Layer "Top Layer-No Net 1" (solid, remove dead copper, pour order 14): -72.25,24.5 -72.25,22 -70.5,22 -70.5,24.5

## Keep-outs
Keep-Out Layer:
  the board outline again, w0.254

## Silkscreen, mask and mechanical layers (free items; w line width, h text height)
Top Overlay:
  text "Marq Drone" at -89.5,45 h2.03
  text "+" at -68.25,38.5 h1.02
  text "20A 13V Max" at -48,37.667 h1.02
  text "VBAT" at -70.344,33.075 h1.02
  text "GND" at -70.36,25.805 h1.02
  text "SCL" at -65.75,19 h1.02
Bottom Overlay:
  text "20A 13V MAX" at -41,38 h1.02
  text "Marq Drone" at -52.964,37.424 h2.03
  text "Nate/Kellen/Cris" at -54,36.25 h1.02
  text "Zallus.com" at -54,35.5 h1.02
  text "Rev 1" at -54,34.75 h1.02
  text "GND" at -73.5,21.75 h1.02 r270
  text "GND" at -71.25,20.25 h1.02
  text "SDA" at -68.75,20.25 h1.02
  text "SCL" at -64.25,19 h1.02

## Panel: embedded boards
"Skale_Controller_PCB_1.PcbDoc" at -259.886,27.896, 1 rows x 1 columns, spacing 0 x 0, rotation 0
"Skale_Controller_PCB_1.PcbDoc" at -350.056,-93.262, 1 rows x 1 columns, spacing 0 x 0, rotation 0

## Text inside footprints (layer, text, board x,y; h text height)
P2: Bottom Overlay "1" at -55.4,19.992 h1; Bottom Overlay "9" at -63.5,19.992 h1